# EAGLE board pentajoy_panel_1 (EAGLE 5.11)
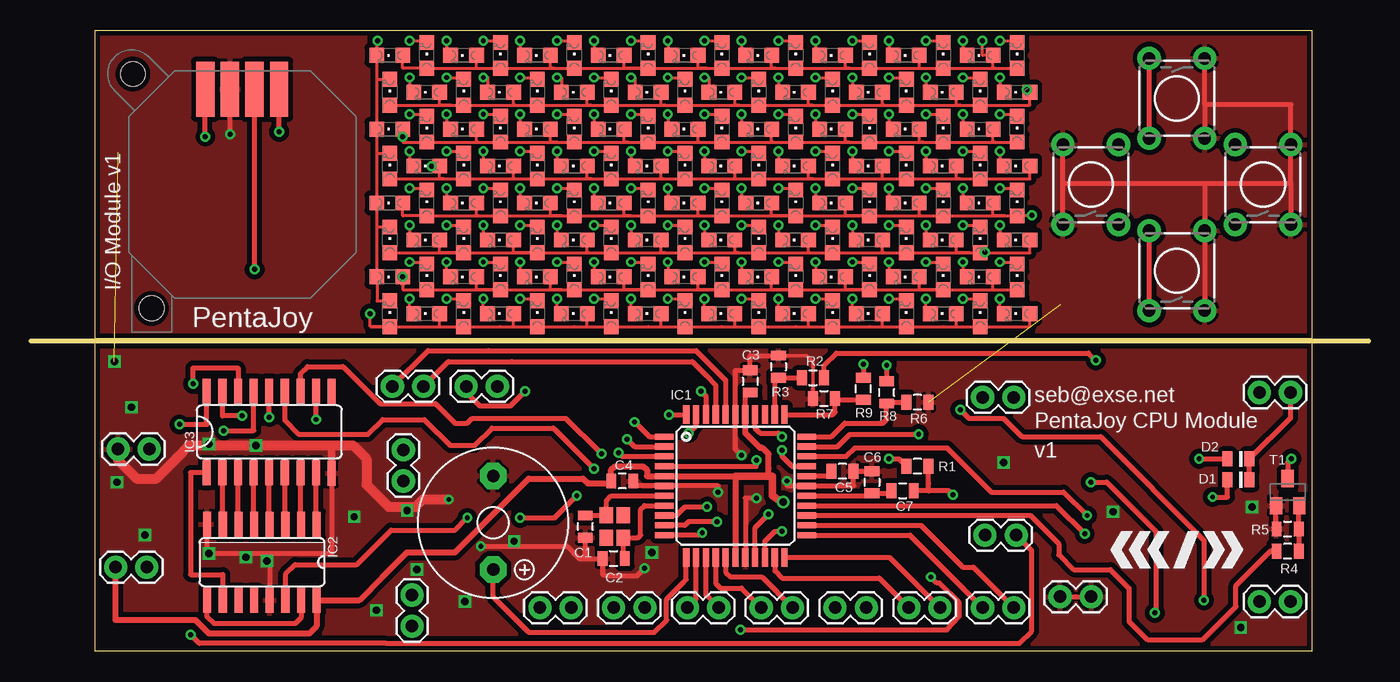
[diagram p0: board, top side]
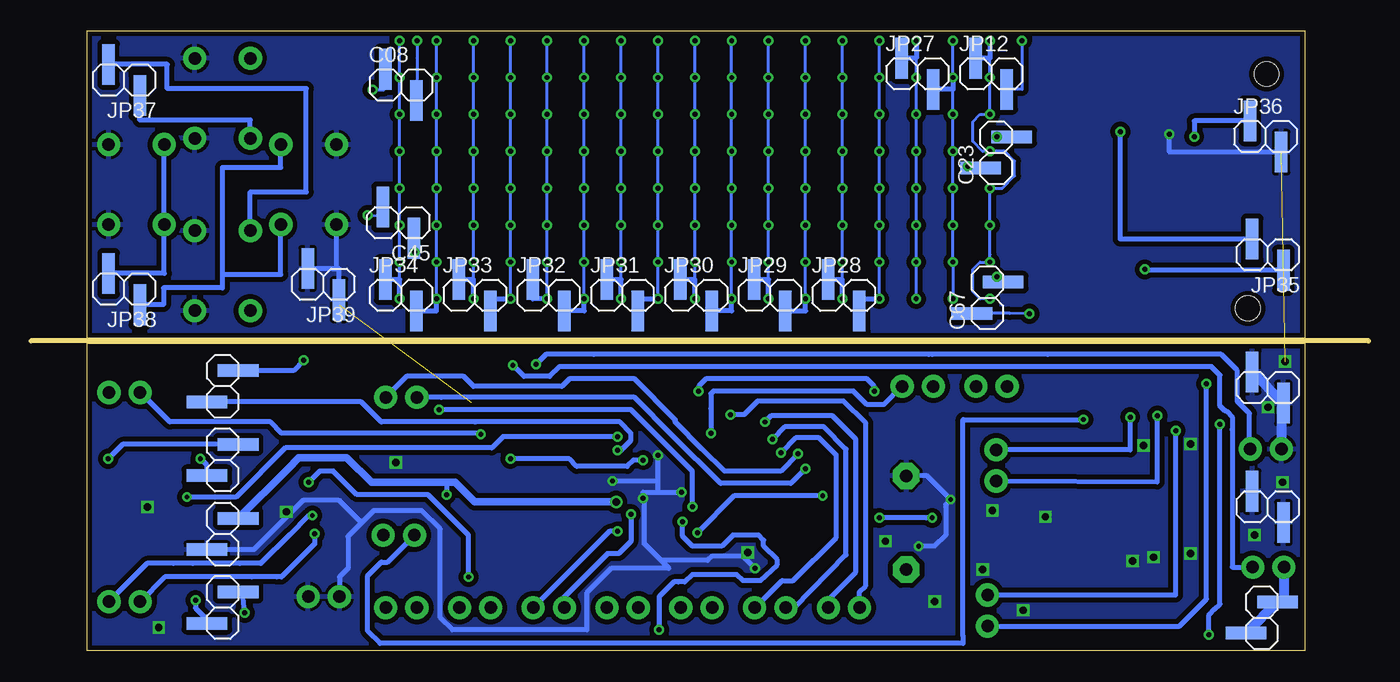
[diagram p1: board, bottom side, seen from below]

Size 108.8 x 50.4 mm. Coordinates in mm from the lower left corner, seen from the top.
Outline: 0,25.2 108.8,25.2
Outline: 104.2,25 5.2,25 5.2,0 104.2,0 104.2,25
Outline: 104.2,50.4 5.2,50.4 5.2,25.4 104.2,25.4 104.2,50.4
Copper layers (1+2*3+16): Top 0.035mm / dielectric 1.5mm / Route2 0.035mm / dielectric 0.15mm / Route3 0.035mm / dielectric 0.2mm / Bottom 0.035mm
Design rules "default *": minimum track width 10mil, minimum drill 0.4mm, track to track 8mil, track to pad 8mil, pad to pad 8mil, via to via 8mil, smd to smd 8mil, copper to edge 15mil, drill to drill 8mil, minimum pad ring 10mil, minimum via ring 8mil, stop-mask expansion 4mil, vias tented up to drill 190mil, thermal gap 10mil

## Footprints (pad centres in the part's own frame; a part is rotated, then mirrored left to right if it is on the bottom)
F/TMB = drill 1.016 pad 2.159 octagon: + 3.81,0; - -3.81,0
0805 = smd 0.8 x 1.2: 1 -0.9,0; 2 0.9,0
1X02SMD = smd 1.016 x 3.302: 1 -1.27,1.27; 2 1.27,-1.27
DIODE_0805 = smd 0.8 x 1.2: 1 -0.9,0; 2 0.9,0
TQFP44 = smd 1.5 x 0.5: 1 -5.8,4; 2 -5.8,3.2; 3 -5.8,2.4; 4 -5.8,1.6; 5 -5.8,0.8; 6 -5.8,0; 7 -5.8,-0.8; 8 -5.8,-1.6; 9 -5.8,-2.4; 10 -5.8,-3.2; 11 -5.8,-4; 23 5.8,-4; 24 5.8,-3.2; 25 5.8,-2.4; 26 5.8,-1.6; 27 5.8,-0.8; 28 5.8,0; 29 5.8,0.8; 30 5.8,1.6; 31 5.8,2.4; 32 5.8,3.2; 33 5.8,4 | smd 0.5 x 1.5: 12 -4,-5.8; 13 -3.2,-5.8; 14 -2.4,-5.8; 15 -1.6,-5.8; 16 -0.8,-5.8; 17 0,-5.8; 18 0.8,-5.8; 19 1.6,-5.8; 20 2.4,-5.8; 21 3.2,-5.8; 22 4,-5.8; 34 4,5.8; 35 3.2,5.8; 36 2.4,5.8; 37 1.6,5.8; 38 0.8,5.8; 39 0,5.8; 40 -0.8,5.8; 41 -1.6,5.8; 42 -2.4,5.8; 43 -3.2,5.8; 44 -4,5.8
SO16 = smd 0.66 x 2.032: 1 -4.445,-3.073; 2 -3.175,-3.073; 3 -1.905,-3.073; 4 -0.635,-3.073; 5 0.635,-3.073; 6 1.905,-3.073; 7 3.175,-3.073; 8 4.445,-3.073; 9 4.445,3.073; 10 3.175,3.073; 11 1.905,3.073; 12 0.635,3.073; 13 -0.635,3.073; 14 -1.905,3.073; 15 -3.175,3.073; 16 -4.445,3.073
SO018 = smd 0.66 x 2.032: 1 -5.08,-3.315; 2 -3.81,-3.315; 3 -2.54,-3.315; 4 -1.27,-3.315; 5 0,-3.315; 6 1.27,-3.315; 7 2.54,-3.315; 8 3.81,-3.315; 9 5.08,-3.353; 10 5.08,3.315; 11 3.81,3.315; 12 2.54,3.315; 13 1.27,3.315; 14 0,3.315; 15 -1.27,3.315; 16 -2.54,3.315; 17 -3.81,3.315; 18 -5.08,3.315
1X02 = drill 1.016 pad 1.88 round: 1 0,0; 2 2.54,0
CHIPLED_0805 = smd 1.2 x 1.2: A 0,-1.05; C 0,1.05
X22 = smd 1.3 x 1.1: 1 0.9,0.7; 2 -0.9,0.7; 3 -0.9,-0.7; 4 0.9,-0.7
TACTILE-PTH = drill 1.016 pad 1.88 round: 1 -3.251,2.261; 2 3.251,2.261; 3 -3.251,-2.261; 4 3.251,-2.261
SOT23-EBC = smd 1 x 1.4: B 0.95,-1.1; C 0,1.1; E -0.95,-1.1
JOYSTICK-PSP1000 = smd 1.5 x 4.5: GND -3,7.75; VCC 1,7.75; X 3,7.75; Y -1,7.75 | hole 2: -8.89,8.985; -7.375,-10.06

## Placement (x,y rotation side)
BUZZ  F/TMB  [F/TMB]  37.6,10.4 270 top
C1  22pF  [0805]  45.1,10.1 90 top
C2  22pF  [0805]  47.4,7.5 0 top
C3  22pF  [0805]  58.5,21.9 270 top
C4  22pF  [0805]  48.1,13.8 180 top
C5  22pF  [0805]  66,14.6 180 top
C6  22pF  [0805]  68.4,13.7 270 top
C7  22pF  [0805]  70.9,13 0 top
C08  [1X02SMD]  78.7,46 0 bottom
C23  [1X02SMD]  30.3,40.5 90 bottom
C45  [1X02SMD]  78.9,34.8 180 bottom
C67  [1X02SMD]  31,28.7 90 bottom
D1  4148  [DIODE_0805]  98.2,13.9 180 top
D2  4148  [DIODE_0805]  98.2,15.6 180 top
IC1  ATMEGA644A  [TQFP44]  57.3,13.4 0 top
IC2  4017D  [SO16]  18.8,7.2 180 top
IC3  [SO018]  19.4,17.8 0 top
JP1  [1X02]  7.1,16.4 0 top
JP2  [1X02]  6.9,6.8 0 top
JP3  [1X02]  99.9,21 0 top
JP4  [1X02]  99.9,4 0 top
JP5  [1X02]  83.7,4.4 0 top
JP6  [1X02SMD]  8.2,21.4 180 bottom
JP7  [1X02SMD]  93.2,9.5 90 bottom
JP8  [1X02SMD]  93.2,3.5 270 bottom
JP9  [1X02SMD]  93.2,21.5 270 bottom
JP10  [1X02SMD]  8.2,11.7 180 bottom
JP11  [1X02SMD]  93.2,15.5 270 bottom
JP12  [1X02SMD]  30.7,46.9 0 bottom
JP13  [1X02SMD]  8.7,2.7 90 bottom
JP14  [1X02]  31,2 90 top
JP15  [1X02]  30.3,13.8 90 top
JP16  [1X02]  29.4,21.5 0 top
JP17  [1X02]  35.4,21.5 0 top
JP18  [1X02]  41.4,3.5 0 top
JP19  [1X02]  47.4,3.5 0 top
JP20  [1X02]  53.4,3.5 0 top
JP21  [1X02]  59.4,3.5 0 top
JP22  [1X02]  65.4,3.5 0 top
JP23  [1X02]  71.4,3.5 0 top
JP24  [1X02]  77.4,3.5 0 top
JP25  [1X02]  77.6,9.4 0 top
JP26  [1X02]  77.4,20.6 0 top
JP27  [1X02SMD]  36.7,46.9 0 bottom
JP28  [1X02SMD]  42.7,28.9 0 bottom
JP29  [1X02SMD]  48.7,28.9 0 bottom
JP30  [1X02SMD]  54.7,28.9 0 bottom
JP31  [1X02SMD]  60.7,28.9 0 bottom
JP32  [1X02SMD]  66.7,28.9 0 bottom
JP33  [1X02SMD]  72.7,28.9 0 bottom
JP34  [1X02SMD]  78.7,28.9 0 bottom
JP35  [1X02SMD]  8.2,32.2 180 bottom
JP36  [1X02SMD]  8.4,41.8 0 bottom
JP37  [1X02SMD]  101.2,46.4 180 bottom
JP38  [1X02SMD]  101.2,29.4 180 bottom
JP39  [1X02SMD]  85,29.8 180 bottom
LED1  [CHIPLED_0805]  29.2,27.4 0 top
LED2  [CHIPLED_0805]  32.2,27.4 90 top
LED3  [CHIPLED_0805]  35.2,27.4 0 top
LED4  [CHIPLED_0805]  38.2,27.4 90 top
LED5  [CHIPLED_0805]  41.2,27.4 0 top
LED6  [CHIPLED_0805]  44.2,27.4 90 top
LED7  [CHIPLED_0805]  47.2,27.4 0 top
LED8  [CHIPLED_0805]  50.2,27.4 90 top
LED9  [CHIPLED_0805]  53.2,27.4 0 top
LED10  [CHIPLED_0805]  56.2,27.4 90 top
LED11  [CHIPLED_0805]  59.2,27.4 0 top
LED12  [CHIPLED_0805]  62.2,27.4 90 top
LED13  [CHIPLED_0805]  65.2,27.4 0 top
LED14  [CHIPLED_0805]  68.2,27.4 90 top
LED15  [CHIPLED_0805]  71.2,27.4 0 top
LED16  [CHIPLED_0805]  74.2,27.4 90 top
LED17  [CHIPLED_0805]  77.2,27.4 0 top
LED18  [CHIPLED_0805]  80.2,27.4 90 top
LED19  [CHIPLED_0805]  29.2,30.4 90 top
LED20  [CHIPLED_0805]  32.2,30.4 0 top
LED21  [CHIPLED_0805]  35.2,30.4 90 top
LED22  [CHIPLED_0805]  38.2,30.4 0 top
LED23  [CHIPLED_0805]  41.2,30.4 90 top
LED24  [CHIPLED_0805]  44.2,30.4 0 top
LED25  [CHIPLED_0805]  47.2,30.4 90 top
LED26  [CHIPLED_0805]  50.2,30.4 0 top
LED27  [CHIPLED_0805]  53.2,30.4 90 top
LED28  [CHIPLED_0805]  56.2,30.4 0 top
LED29  [CHIPLED_0805]  59.2,30.4 90 top
LED30  [CHIPLED_0805]  62.2,30.4 0 top
LED31  [CHIPLED_0805]  65.2,30.4 90 top
LED32  [CHIPLED_0805]  68.2,30.4 0 top
LED33  [CHIPLED_0805]  71.2,30.4 90 top
LED34  [CHIPLED_0805]  74.2,30.4 0 top
LED35  [CHIPLED_0805]  77.2,30.4 90 top
LED36  [CHIPLED_0805]  80.2,30.4 0 top
LED37  [CHIPLED_0805]  29.2,33.4 0 top
LED38  [CHIPLED_0805]  32.2,33.4 90 top
LED39  [CHIPLED_0805]  35.2,33.4 0 top
LED40  [CHIPLED_0805]  38.2,33.4 90 top
LED41  [CHIPLED_0805]  41.2,33.4 0 top
LED42  [CHIPLED_0805]  44.2,33.4 90 top
LED43  [CHIPLED_0805]  47.2,33.4 0 top
LED44  [CHIPLED_0805]  50.2,33.4 90 top
LED45  [CHIPLED_0805]  53.2,33.4 0 top
LED46  [CHIPLED_0805]  56.2,33.4 90 top
LED47  [CHIPLED_0805]  59.2,33.4 0 top
LED48  [CHIPLED_0805]  62.2,33.4 90 top
LED49  [CHIPLED_0805]  65.2,33.4 0 top
LED50  [CHIPLED_0805]  68.2,33.4 90 top
LED51  [CHIPLED_0805]  71.2,33.4 0 top
LED52  [CHIPLED_0805]  74.2,33.4 90 top
LED53  [CHIPLED_0805]  77.2,33.4 0 top
LED54  [CHIPLED_0805]  80.2,33.4 90 top
LED55  [CHIPLED_0805]  29.2,36.4 90 top
LED56  [CHIPLED_0805]  32.2,36.4 0 top
LED57  [CHIPLED_0805]  35.2,36.4 90 top
LED58  [CHIPLED_0805]  38.2,36.4 0 top
LED59  [CHIPLED_0805]  41.2,36.4 90 top
LED60  [CHIPLED_0805]  44.2,36.4 0 top
LED61  [CHIPLED_0805]  47.2,36.4 90 top
LED62  [CHIPLED_0805]  50.2,36.4 0 top
LED63  [CHIPLED_0805]  53.2,36.4 90 top
LED64  [CHIPLED_0805]  56.2,36.4 0 top
LED65  [CHIPLED_0805]  59.2,36.4 90 top
LED66  [CHIPLED_0805]  62.2,36.4 0 top
LED67  [CHIPLED_0805]  65.2,36.4 90 top
LED68  [CHIPLED_0805]  68.2,36.4 0 top
LED69  [CHIPLED_0805]  71.2,36.4 90 top
LED70  [CHIPLED_0805]  74.2,36.4 0 top
LED71  [CHIPLED_0805]  77.2,36.4 90 top
LED72  [CHIPLED_0805]  80.2,36.4 0 top
LED73  [CHIPLED_0805]  29.2,39.4 0 top
LED74  [CHIPLED_0805]  32.2,39.4 90 top
LED75  [CHIPLED_0805]  35.2,39.4 0 top
LED76  [CHIPLED_0805]  38.2,39.4 90 top
LED77  [CHIPLED_0805]  41.2,39.4 0 top
LED78  [CHIPLED_0805]  44.2,39.4 90 top
LED79  [CHIPLED_0805]  47.2,39.4 0 top
LED80  [CHIPLED_0805]  50.2,39.4 90 top
LED81  [CHIPLED_0805]  53.2,39.4 0 top
LED82  [CHIPLED_0805]  56.2,39.4 90 top
LED83  [CHIPLED_0805]  59.2,39.4 0 top
LED84  [CHIPLED_0805]  62.2,39.4 90 top
LED85  [CHIPLED_0805]  65.2,39.4 0 top
LED86  [CHIPLED_0805]  68.2,39.4 90 top
LED87  [CHIPLED_0805]  71.2,39.4 0 top
LED88  [CHIPLED_0805]  74.2,39.4 90 top
LED89  [CHIPLED_0805]  77.2,39.4 0 top
LED90  [CHIPLED_0805]  80.2,39.4 90 top
LED91  [CHIPLED_0805]  29.2,42.4 90 top
LED92  [CHIPLED_0805]  32.2,42.4 0 top
LED93  [CHIPLED_0805]  35.2,42.4 90 top
LED94  [CHIPLED_0805]  38.2,42.4 0 top
LED95  [CHIPLED_0805]  41.2,42.4 90 top
LED96  [CHIPLED_0805]  44.2,42.4 0 top
LED97  [CHIPLED_0805]  47.2,42.4 90 top
LED98  [CHIPLED_0805]  50.2,42.4 0 top
LED99  [CHIPLED_0805]  53.2,42.4 90 top
LED100  [CHIPLED_0805]  56.2,42.4 0 top
LED101  [CHIPLED_0805]  59.2,42.4 90 top
LED102  [CHIPLED_0805]  62.2,42.4 0 top
LED103  [CHIPLED_0805]  65.2,42.4 90 top
LED104  [CHIPLED_0805]  68.2,42.4 0 top
LED105  [CHIPLED_0805]  71.2,42.4 90 top
LED106  [CHIPLED_0805]  74.2,42.4 0 top
LED107  [CHIPLED_0805]  77.2,42.4 90 top
LED108  [CHIPLED_0805]  80.2,42.4 0 top
LED109  [CHIPLED_0805]  29.2,45.4 0 top
LED110  [CHIPLED_0805]  32.2,45.4 90 top
LED111  [CHIPLED_0805]  35.2,45.4 0 top
LED112  [CHIPLED_0805]  38.2,45.4 90 top
LED113  [CHIPLED_0805]  41.2,45.4 0 top
LED114  [CHIPLED_0805]  44.2,45.4 90 top
LED115  [CHIPLED_0805]  47.2,45.4 0 top
LED116  [CHIPLED_0805]  50.2,45.4 90 top
LED117  [CHIPLED_0805]  53.2,45.4 0 top
LED118  [CHIPLED_0805]  56.2,45.4 90 top
LED119  [CHIPLED_0805]  59.2,45.4 0 top
LED120  [CHIPLED_0805]  62.2,45.4 90 top
LED121  [CHIPLED_0805]  65.2,45.4 0 top
LED122  [CHIPLED_0805]  68.2,45.4 90 top
LED123  [CHIPLED_0805]  71.2,45.4 0 top
LED124  [CHIPLED_0805]  74.2,45.4 90 top
LED125  [CHIPLED_0805]  77.2,45.4 0 top
LED126  [CHIPLED_0805]  80.2,45.4 90 top
LED127  [CHIPLED_0805]  29.2,48.4 90 top
LED128  [CHIPLED_0805]  32.2,48.4 0 top
LED129  [CHIPLED_0805]  35.2,48.4 90 top
LED130  [CHIPLED_0805]  38.2,48.4 0 top
LED131  [CHIPLED_0805]  41.2,48.4 90 top
LED132  [CHIPLED_0805]  44.2,48.4 0 top
LED133  [CHIPLED_0805]  47.2,48.4 90 top
LED134  [CHIPLED_0805]  50.2,48.4 0 top
LED135  [CHIPLED_0805]  53.2,48.4 90 top
LED136  [CHIPLED_0805]  56.2,48.4 0 top
LED137  [CHIPLED_0805]  59.2,48.4 90 top
LED138  [CHIPLED_0805]  62.2,48.4 0 top
LED139  [CHIPLED_0805]  65.2,48.4 90 top
LED140  [CHIPLED_0805]  68.2,48.4 0 top
LED141  [CHIPLED_0805]  71.2,48.4 90 top
LED142  [CHIPLED_0805]  74.2,48.4 0 top
LED143  [CHIPLED_0805]  77.2,48.4 90 top
LED144  [CHIPLED_0805]  80.2,48.4 0 top
Q1  20Mhz  [X22]  47.5,10.1 270 top
R1  4,7k  [0805]  72.1,15 180 top
R2  4,7k  [0805]  63.6,22.2 0 top
R3  4,7k  [0805]  60.8,23.1 270 top
R4  4,7k  [0805]  102.2,8.1 180 top
R5  4,7k  [0805]  102.2,9.9 0 top
R6  4,7k  [0805]  72.1,20.2 180 top
R7  4,7k  [0805]  64.5,20.5 0 top
R8  4,7k  [0805]  69.6,21 90 top
R9  4,7k  [0805]  67.7,21.3 90 top
S1  [TACTILE-PTH]  93.2,44.9 270 top
S2  [TACTILE-PTH]  86.2,37.9 90 top
S3  [TACTILE-PTH]  100.2,37.9 90 top
S5  [TACTILE-PTH]  93.2,30.9 90 top
T1  [SOT23-EBC]  102.2,12.9 0 top
U$1  JOYSTICK-PSP1000  [JOYSTICK-PSP1000]  17.2,37.9 0 top

## Library data of the parts
BUZZ = buzzer
C1-C7 IC3 JP1-JP5 JP14-JP26 R1-R9 S1-S3 S5 U$1 = SparkFun
C08 C23 C45 C67 JP6-JP13 JP27-JP39 = pinhead-2
D1 D2 Q1 = seb
IC1 = atmel; MPN: ATMEGA644PV-10AU; OC_FARNELL: 1455123; OC_NEWARK: 58M3748
IC2 = 40xx
LED1-LED144 = led
T1 = transistor

## Nets
+5V: C3.2 C4.2 C7.2 IC1.5 IC1.17 IC1.38 IC2.16 JP2.1 JP7.2 JP13.1 JP13.2 R1.1
B: IC1.26 JP4.1
C: IC1.31 JP4.2
COL0: IC1.40 JP16.1
COL1: IC1.41 JP16.2
COL2: IC1.42 JP17.1
COL3: IC1.43 JP17.2
COL4: IC1.44 JP18.1
COL5: IC1.1 JP18.2
COL6: IC1.2 JP19.1
COL7: IC1.3 JP19.2
COL8: IC1.13 JP20.1
COL9: IC1.14 JP20.2
COL10: IC1.15 JP21.1
COL11: IC1.16 JP21.2
COL12: IC1.19 JP22.1
COL13: IC1.20 JP22.2
COL14: IC1.21 JP23.1
COL15: IC1.22 JP23.2
COL16: IC1.23 JP24.1
COL17: IC1.24 JP24.2
COL18: JP12.2 LED1.C LED19.C LED37.C LED55.C LED73.C LED91.C LED109.C LED127.C
COL19: JP12.1 LED2.C LED20.C LED38.C LED56.C LED74.C LED92.C LED110.C LED128.C
COL20: JP27.2 LED3.C LED21.C LED39.C LED57.C LED75.C LED93.C LED111.C LED129.C
COL21: JP27.1 LED4.C LED22.C LED40.C LED58.C LED76.C LED94.C LED112.C LED130.C
COL22: JP28.2 LED5.C LED23.C LED41.C LED59.C LED77.C LED95.C LED113.C LED131.C
COL23: JP28.1 LED6.C LED24.C LED42.C LED60.C LED78.C LED96.C LED114.C LED132.C
COL24: JP29.2 LED7.C LED25.C LED43.C LED61.C LED79.C LED97.C LED115.C LED133.C
COL25: JP30.1 LED10.C LED28.C LED46.C LED64.C LED82.C LED100.C LED118.C LED136.C
COL26: JP31.2 LED11.C LED29.C LED47.C LED65.C LED83.C LED101.C LED119.C LED137.C
COL27: JP30.2 LED9.C LED27.C LED45.C LED63.C LED81.C LED99.C LED117.C LED135.C
COL28: JP29.1 LED8.C LED26.C LED44.C LED62.C LED80.C LED98.C LED116.C LED134.C
COL29: JP31.1 LED12.C LED30.C LED48.C LED66.C LED84.C LED102.C LED120.C LED138.C
COL30: JP32.2 LED13.C LED31.C LED49.C LED67.C LED85.C LED103.C LED121.C LED139.C
COL31: JP32.1 LED14.C LED32.C LED50.C LED68.C LED86.C LED104.C LED122.C LED140.C
COL32: JP33.2 LED15.C LED33.C LED51.C LED69.C LED87.C LED105.C LED123.C LED141.C
COL33: JP33.1 LED16.C LED34.C LED52.C LED70.C LED88.C LED106.C LED124.C LED142.C
COL34: JP34.2 LED17.C LED35.C LED53.C LED71.C LED89.C LED107.C LED125.C LED143.C
COL35: JP34.1 LED18.C LED36.C LED54.C LED72.C LED90.C LED108.C LED126.C LED144.C
D: IC1.32 JP3.1
E: D1.1 D2.1 JP3.2
GND: BUZZ.- C1.1 C2.1 C3.1 C4.1 C5.1 C6.1 IC1.6 IC1.18 IC1.28 IC1.39 IC2.8 IC2.13 IC3.9 JP1.1 JP5.1 JP5.2 JP6.1 JP6.2 JP7.1 JP10.1 JP10.2 JP36.2 JP39.1 JP39.2 R3.1 R5.1 R6.1 R7.1 S1.1 S1.2 S2.1 S2.2 S3.3 S3.4 S5.3 S5.4 T1.E U$1.Y
N$1: D1.2 IC1.37
N$2: IC1.25 R4.2
N$3: C5.2 IC1.29
N$4: IC1.30 JP9.2
N$5: IC1.11 IC2.14
N$6: IC2.9 IC2.15
N$7: C2.2 IC1.8 Q1.1
N$8: C1.2 IC1.7 Q1.3
N$9: C6.2 C7.1 IC1.27
N$10: R4.1 R5.2 T1.B
N$11: BUZZ.+ IC1.12
N$12: JP38.1 S2.3 S2.4
N$13: JP38.2 S3.1 S3.2
N$14: IC1.33 R6.2 R8.1
N$15: IC1.34 R7.2 R9.1
N$16: JP37.1 S1.3 S1.4
N$17: JP37.2 S5.1 S5.2
N$20: JP35.1 U$1.VCC
N$21: JP35.2 U$1.X
N$22: JP36.1 U$1.GND
N$28: IC1.35 R2.1 R3.2
N$56: IC2.1 IC3.8
N$57: IC2.2 IC3.7
N$58: IC2.3 IC3.6
N$59: IC2.4 IC3.5
N$60: IC2.5 IC3.4
N$61: IC2.6 IC3.3
N$62: IC2.7 IC3.2
N$63: IC2.10 IC3.1
OFF: JP11.1 T1.C
ON: D2.2 JP11.2
POWER: JP9.1 R2.2
ROW0: IC3.13 JP26.1
ROW1: IC3.12 JP26.2
ROW2: IC3.14 JP15.2
ROW3: IC3.17 JP15.1
ROW4: IC3.18 JP25.2
ROW5: IC3.11 JP25.1
ROW6: IC3.15 JP14.2
ROW7: IC3.16 JP14.1
ROW8: C67.1 LED1.A LED2.A LED3.A LED4.A LED5.A LED6.A LED7.A LED8.A LED9.A LED10.A LED11.A LED12.A LED13.A LED14.A LED15.A LED16.A LED17.A LED18.A
ROW9: C67.2 LED19.A LED20.A LED21.A LED22.A LED23.A LED24.A LED25.A LED26.A LED27.A LED28.A LED29.A LED30.A LED31.A LED32.A LED33.A LED34.A LED35.A LED36.A
ROW10: C45.1 LED37.A LED38.A LED39.A LED40.A LED41.A LED42.A LED43.A LED44.A LED45.A LED46.A LED47.A LED48.A LED49.A LED50.A LED51.A LED52.A LED53.A LED54.A
ROW11: C45.2 LED55.A LED56.A LED57.A LED58.A LED59.A LED60.A LED61.A LED62.A LED63.A LED64.A LED65.A LED66.A LED67.A LED68.A LED69.A LED70.A LED71.A LED72.A
ROW12: C23.1 LED73.A LED74.A LED75.A LED76.A LED77.A LED78.A LED79.A LED80.A LED81.A LED82.A LED83.A LED84.A LED85.A LED86.A LED87.A LED88.A LED89.A LED90.A
ROW13: C23.2 LED91.A LED92.A LED93.A LED94.A LED95.A LED96.A LED97.A LED98.A LED99.A LED100.A LED101.A LED102.A LED103.A LED104.A LED105.A LED106.A LED107.A LED108.A
ROW14: C08.1 LED109.A LED110.A LED111.A LED112.A LED113.A LED114.A LED115.A LED116.A LED117.A LED118.A LED119.A LED120.A LED121.A LED122.A LED123.A LED124.A LED125.A LED126.A
ROW15: C08.2 LED127.A LED128.A LED129.A LED130.A LED131.A LED132.A LED133.A LED134.A LED135.A LED136.A LED137.A LED138.A LED139.A LED140.A LED141.A LED142.A LED143.A LED144.A
RST: IC1.4 R1.2
RX: IC1.9 JP8.2
TX: IC1.10 JP8.1
X: JP1.2 R9.2
Y: JP2.2 R8.2

## Tracks (layer width: path | path; a pad name or v marks a point on that pad's centre or on a via)
+5V  (via drill 0.4, 0.6)
  Top 0.406: 60,14.2 60.3,14.2 | 73,13 C7.2 | 73,13 73,13.6 R1.1 | 61,12.1 v61.2,12.1 | 47.2,13.6 C4.2 | v75,12.7 74.7,13 73,13 | IC1.38 58.1,21 C3.2
  Top 0.5: IC1.17 57.3,14.2 IC1.5 50.1,14.2 50.1,14.7 49.8,15 47.5,15 47.2,14.7 C4.2 | IC1.38 58.1,17.9 58.1,17.7 58.8,17 59.3,16.5 59.5,16.5 60,16 60,14.8 60,14.2 | JP2.1 6.9,2.5 13.4,2.5 14.5,1.4 22.64,1.4 23.24,2 IC2.16 26.73,4.13 28.6,6 30.6,8 34.5,8 40.5,14 44.9,14 45,13.9 45.3,13.6 47.2,13.6
  Top 0.61: 57.3,14.2 60,14.2 | 60,14.2 60.3,14.2 | 60,14.2 60.3,14.2 | 60.3,14.2 60.3,12.6 61,12.1
  Bottom 0.406: 6.9,4.3 JP13.2 | 74.3,13.7 75,13.7 v75,12.7
  Bottom 0.61: v61.2,12.1 72.7,12.1 74.3,13.7 75,13.7 81.1,13.7 83.1,15.7 87,15.7 87.93,14.77 JP7.2
  Bottom 0.813: JP13.2 JP13.1 | JP2.1 6.9,4.3
B  (via drill 0.4)
  Top 0.406: IC1.26 83.4,11.8 v85.7,9.5
  Bottom 0.406: v85.7,9.5 85.7,8.7 88.4,6 88.8,6 90.8,6 97.9,6 JP4.1
C  (via drill 0.4)
  Top 0.406: IC1.31 66.3,15.8 67,16.5 74.5,16.5 78.1,12.9 84,12.9 v85.9,11
  Bottom 0.406: v85.9,11 86.2,11 87.8,9.4 | 87.8,9.4 88,9.2 87.8,9.4 | 87.8,9.4 90.1,7.1 91.8,7.1 95.6,7.1 97.2,7.1 99.34,7.1 JP4.2
COL0
  Top 0.406: JP16.1 32.3,24.4 37.2,24.4 54.1,24.4 55.9,22.6 56.5,22 IC1.40
COL1
  Top 0.406: JP16.2 33.94,23.5 39.1,23.5 53.8,23.5 54.9,22.4 55.7,21.6 IC1.41
COL2  (via drill 0.4)
  Top 0.406: v40.2,21.1 39,19.9 36.5,19.9 35.4,21 JP17.1 | v54.5,21.1 54.9,20.7 IC1.42
  Bottom 0.406: v54.5,21.1 54.5,21.5 53.9,22.1 40.8,22.1 40.2,21.5 v40.2,21.1
COL3  (via drill 0.4)
  Top 0.406: v53.5,17.7 54.1,18.3 IC1.43
  Bottom 0.406: v53.5,17.7 53.5,19.7 53.5,20.9 53.3,21.1 52.8,21.1 51,21.1 50.6,21.1 41.9,21.1 40.8,20 39.44,20 JP17.2
COL4  (via drill 0.4)
  Top 0.406: v51.9,19.2 IC1.44
  Bottom 0.406: v51.9,19.2 50.8,19.2 49.7,20.3 42.7,20.3 40.9,18.5 40.9,17.9 40.9,5.3 41.4,4.8 JP18.1
COL5  (via drill 0.4)
  Top 0.406: v49.1,18.6 50.3,17.4 IC1.1
  Bottom 0.406: JP18.2 43.94,4.16 41.7,6.4 41.7,17.2 43.6,19.1 48.6,19.1 v49.1,18.6
COL6  (via drill 0.4)
  Top 0.406: v48.5,17.2 49.1,16.6 IC1.2
  Bottom 0.406: JP19.1 46.7,3.5 42.5,7.8 42.5,16.4 44.3,18.2 47.5,18.2 v48.5,17.2
COL7  (via drill 0.4)
  Top 0.406: IC1.3 48.1,15.8 v47.8,16.1
  Bottom 0.406: JP19.2 49.9,3.5 47.7,5.7 46.8,5.7 43.3,9.2 43.3,15.9 44.7,17.3 46.6,17.3 v47.8,16.1
COL8
  Top 0.406: IC1.13 54.1,4.2 JP20.1
COL9
  Top 0.406: JP20.2 54.9,4.54 IC1.14
COL10
  Top 0.406: JP21.1 57.8,5.1 56.1,5.1 55.7,5.5 IC1.15
COL11
  Top 0.406: JP21.2 59.44,6 56.9,6 56.5,6.4 IC1.16
COL12  (via drill 0.4)
  Top 0.406: IC1.19 58.9,10 v60,11.1
  Bottom 0.406: v60,11.1 60,8.9 61,7.9 61.9,7.9 65.4,4.4 JP22.1
COL13  (via drill 0.4)
  Top 0.406: IC1.20 59.7,8.9 60.5,9.7 v61.1,9.7
  Bottom 0.406: v61.1,9.7 61.74,9.7 JP22.2
COL14
  Top 0.406: IC1.21 60.5,6.5 61.1,5.9 69,5.9 JP23.1
COL15
  Top 0.406: IC1.22 69.84,7.6 JP23.2
COL16
  Top 0.406: IC1.23 71.5,9.4 JP24.1
COL17
  Top 0.406: IC1.24 72.4,10.2 75.8,6.8 76.64,6.8 JP24.2
COL18  (via drill 0.4)
  Top 0.254: LED1.C 28.15,28.45 LED19.C 28.15,34.45 | 28.15,34.45 LED37.C | 28.15,34.45 LED55.C 28.15,40.4 | 28.15,40.4 LED91.C 28.15,46.4 | 28.15,46.4 LED127.C 28.15,49.6 v28.2,49.6 | LED73.C 28.15,40.45 28.15,40.4 | LED109.C 28.15,46.45 28.15,46.4
  Bottom 0.254: JP12.2 28.2,45.63 v28.2,49.6
COL19  (via drill 0.4)
  Top 0.254: LED2.C 30.8,27.4 v30.8,28.6 | v30.8,34.6 30.8,33.4 LED38.C | LED20.C 32.2,31.6 v30.8,31.6 | v30.8,49.6 32.2,49.6 LED128.C | LED56.C 32.2,37.6 v30.8,37.6 | LED74.C 30.8,39.4 v30.8,40.6 | LED92.C 32.2,43.6 v30.8,43.6 | LED110.C 30.8,45.4 v30.8,46.6
  Bottom 0.254: v30.8,31.6 30.8,32.2 | 30.8,32.2 v30.8,34.6 v30.8,37.6 29.8,37.6 28.8,38.6 28.8,39.8 29.6,40.6 v30.8,40.6 31.4,40.6 32.2,41.4 32.2,43 31.6,43.6 v30.8,43.6 v30.8,46.6 | v30.8,31.6 30.8,32.2 | v30.8,46.6 30.8,46.8 | 30.8,46.8 v30.8,49.6 | v30.8,46.6 30.8,46.8 | v30.8,28.6 31.6,28.6 32.2,29.2 32.2,31 31.6,31.6 v30.8,31.6
  Bottom 0.406: JP12.1 30.8,48.17 v30.8,49.6
COL20  (via drill 0.4)
  Top 0.254: LED3.C 35.2,28.6 v33.8,28.6 | v33.8,49.6 33.8,48.4 LED129.C | v33.8,46.6 35.2,46.6 LED111.C | LED93.C 33.8,42.4 v33.8,43.6 | LED57.C 33.8,36.4 v33.8,37.6 | v33.8,40.6 35.2,40.6 LED75.C | v33.8,34.6 35.2,34.6 LED39.C | LED21.C 33.8,30.4 v33.8,31.6
  Bottom 0.254: v33.8,49.6 v33.8,46.6 v33.8,43.6 v33.8,40.6 v33.8,37.6 v33.8,34.6 v33.8,31.6 v33.8,28.6
  Bottom 0.406: JP27.2 33.8,45.63 v33.8,46.6
COL21  (via drill 0.4)
  Top 0.254: LED4.C 36.8,27.4 v36.8,28.6 | v36.8,49.6 38.2,49.6 LED130.C | v36.8,46.6 37.15,46.6 LED112.C | v36.8,43.6 38.2,43.6 LED94.C | v36.8,31.6 38.2,31.6 LED22.C | v36.8,37.6 38.2,37.6 LED58.C | LED40.C 36.8,33.4 v36.8,34.6 | LED76.C 36.8,39.4 v36.8,40.6
  Bottom 0.254: v36.8,49.6 v36.8,46.6 v36.8,43.6 v36.8,40.6 v36.8,37.6 v36.8,34.6 v36.8,31.6 v36.8,28.6
  Bottom 0.406: JP27.1 36.8,48.17 v36.8,49.6
COL22  (via drill 0.4)
  Top 0.254: LED5.C 41.2,28.6 v39.8,28.6 | v39.8,49.6 39.8,48.4 LED131.C | v39.8,46.6 41.2,46.6 LED113.C | v39.8,40.6 41.2,40.6 LED77.C | v39.8,34.6 41.2,34.6 LED41.C | LED95.C 39.8,42.4 v39.8,43.6 | LED23.C 39.8,30.4 v39.8,31.6 | LED59.C 39.8,36.4 v39.8,37.6
  Bottom 0.254: v39.8,49.6 v39.8,46.6 v39.8,43.6 v39.8,40.6 v39.8,37.6 v39.8,34.6 v39.8,31.6 v39.8,28.6
  Bottom 0.406: v39.8,28.6 41.43,28.6 JP28.2
COL23  (via drill 0.4)
  Top 0.254: LED6.C 42.8,27.4 v42.8,28.6 | v42.8,49.6 44.2,49.6 LED132.C | v42.8,46.6 43.15,46.6 LED114.C | v42.8,43.6 44.2,43.6 LED96.C | v42.8,37.6 44.2,37.6 LED60.C | v42.8,31.6 44.2,31.6 LED24.C | LED78.C 42.8,39.4 v42.8,40.6 | LED42.C 42.8,33.4 v42.8,34.6
  Bottom 0.254: v42.8,49.6 v42.8,46.6 v42.8,43.6 v42.8,40.6 v42.8,37.6 v42.8,34.6 v42.8,31.6 v42.8,28.6
  Bottom 0.406: JP28.1 42.8,30.17 v42.8,28.6
COL24  (via drill 0.4)
  Top 0.254: LED7.C 47.2,28.6 v45.8,28.6 | v45.8,49.6 45.8,48.4 LED133.C | v45.8,46.6 47.2,46.6 LED115.C | LED97.C 45.8,42.4 v45.8,43.6 | v45.8,40.6 47.2,40.6 LED79.C | LED25.C 45.8,30.4 v45.8,31.6 | v45.8,34.6 47.2,34.6 LED43.C | LED61.C 45.8,36.4 v45.8,37.6
  Bottom 0.254: v45.8,49.6 v45.8,46.6 v45.8,43.6 v45.8,40.6 v45.8,37.6 v45.8,34.6 v45.8,31.6 v45.8,28.6
  Bottom 0.406: JP29.2 45.8,27.63 v45.8,28.6
COL25  (via drill 0.4)
  Top 0.254: LED10.C 54.8,27.4 v54.8,28.6 | v54.8,49.6 56.2,49.6 LED136.C | v54.8,46.6 55.15,46.6 LED118.C | v54.8,43.6 56.2,43.6 LED100.C | LED46.C 54.8,33.4 v54.8,34.6 | v54.8,37.6 56.2,37.6 LED64.C | LED82.C 54.8,39.4 v54.8,40.6 | v54.8,31.6 56.2,31.6 LED28.C
  Bottom 0.254: v54.8,49.6 v54.8,46.6 v54.8,43.6 v54.8,40.6 v54.8,37.6 v54.8,34.6 v54.8,31.6 v54.8,28.6
  Bottom 0.406: JP30.1 54.8,30.17 v54.8,28.6
COL26  (via drill 0.4)
  Top 0.254: LED11.C 59.2,28.6 v57.8,28.6 | v57.8,49.6 57.8,48.4 LED137.C | v57.8,46.6 59.2,46.6 LED119.C | v57.8,40.6 59.2,40.6 LED83.C | LED29.C 57.8,30.4 v57.8,31.6 | v57.8,34.6 59.2,34.6 LED47.C | LED65.C 57.8,36.4 v57.8,37.6 | LED101.C 57.8,42.4 v57.8,43.6
  Bottom 0.254: v57.8,49.6 v57.8,46.6 v57.8,43.6 v57.8,40.6 v57.8,37.6 v57.8,34.6 v57.8,31.6 v57.8,28.6
  Bottom 0.406: v57.8,28.6 59.43,28.6 JP31.2
COL27  (via drill 0.4)
  Top 0.254: LED9.C 53.2,28.6 v51.8,28.6 | v51.8,49.6 51.8,48.4 LED135.C | v51.8,46.6 53.2,46.6 LED117.C | LED27.C 51.8,30.4 v51.8,31.6 | v51.8,34.6 53.2,34.6 LED45.C | LED63.C 51.8,36.4 v51.8,37.6 | v51.8,40.6 53.2,40.6 LED81.C | LED99.C 51.8,42.4 v51.8,43.6
  Bottom 0.254: v51.8,49.6 v51.8,46.6 v51.8,43.6 v51.8,40.6 v51.8,37.6 v51.8,34.6 v51.8,31.6 v51.8,28.6
  Bottom 0.406: JP30.2 51.8,27.63 v51.8,28.6
COL28  (via drill 0.4)
  Top 0.254: LED8.C 48.8,27.4 v48.8,28.6 | v48.8,49.6 50.2,49.6 LED134.C | v48.8,46.6 49.15,46.6 LED116.C | v48.8,43.6 50.2,43.6 LED98.C | v48.8,37.6 50.2,37.6 LED62.C | v48.8,31.6 50.2,31.6 LED26.C | LED44.C 48.8,33.4 v48.8,34.6 | LED80.C 48.8,39.4 v48.8,40.6
  Bottom 0.254: v48.8,49.6 v48.8,46.6 v48.8,43.6 v48.8,40.6 v48.8,37.6 v48.8,34.6 v48.8,31.6 v48.8,28.6
  Bottom 0.406: JP29.1 48.8,30.17 v48.8,28.6
COL29  (via drill 0.4)
  Top 0.254: LED12.C 60.8,27.4 v60.8,28.6 | v60.8,49.6 62.2,49.6 LED138.C | v60.8,31.6 62.2,31.6 LED30.C | v60.8,43.6 62.2,43.6 LED102.C | 62.2,37.9 LED66.C 62.2,37.6 v60.8,37.6 | LED48.C 60.8,33.4 v60.8,34.6 | LED84.C 60.8,39.4 v60.8,40.6 | LED120.C 60.8,45.4 v60.8,46.6
  Bottom 0.254: v60.8,28.6 v60.8,31.6 v60.8,34.6 v60.8,37.6 v60.8,40.6 v60.8,43.6 v60.8,46.6 v60.8,49.6
  Bottom 0.406: JP31.1 60.8,30.17 v60.8,28.6
COL30  (via drill 0.4)
  Top 0.254: LED13.C 65.2,28.6 v63.8,28.6 | v63.8,49.6 63.8,48.4 LED139.C | v63.8,34.6 65.2,34.6 LED49.C | v63.8,40.6 65.2,40.6 LED85.C | LED31.C 63.8,30.4 v63.8,31.6 | LED67.C 63.8,36.4 v63.8,37.6 | LED103.C 63.8,42.4 v63.8,43.6 | v63.8,46.6 65.2,46.6 LED121.C
  Bottom 0.254: v63.8,28.6 v63.8,31.6 v63.8,34.6 v63.8,37.6 v63.8,40.6 v63.8,43.6 v63.8,46.6 v63.8,49.6
  Bottom 0.406: JP32.2 63.8,27.63 v63.8,28.6
COL31  (via drill 0.4)
  Top 0.254: LED14.C 66.8,27.4 v66.8,28.6 | v66.8,49.6 68.2,49.6 LED140.C | v66.8,43.6 68.2,43.6 LED104.C | v66.8,31.6 68.2,31.6 LED32.C | v66.8,37.6 68.2,37.6 LED68.C | LED50.C 66.8,33.4 v66.8,34.6 | LED86.C 66.8,39.4 v66.8,40.6 | LED122.C 66.8,45.4 v66.8,46.6
  Bottom 0.254: v66.8,28.6 v66.8,31.6 v66.8,34.6 v66.8,37.6 v66.8,40.6 v66.8,43.6 v66.8,46.6 v66.8,49.6
  Bottom 0.406: v66.8,28.6 67.97,28.6 JP32.1
COL32  (via drill 0.4)
  Top 0.254: LED15.C 71.2,28.6 v69.8,28.6 | v69.8,49.6 69.8,48.4 LED141.C | v69.8,34.6 71.2,34.6 LED51.C | v69.8,40.6 71.2,40.6 LED87.C | LED33.C 69.8,30.4 v69.8,31.6 | LED69.C 69.8,36.4 v69.8,37.6 | LED105.C 69.8,42.4 v69.8,43.6 | v69.8,46.6 71.2,46.6 LED123.C
  Bottom 0.254: v69.8,28.6 v69.8,31.6 v69.8,34.6 v69.8,37.6 v69.8,40.6 v69.8,43.6 v69.8,46.6 v69.8,49.6
  Bottom 0.406: v69.8,28.6 71.43,28.6 JP33.2
COL33  (via drill 0.4)
  Top 0.254: LED16.C 72.8,27.4 v72.8,28.6 | v72.8,49.6 74.2,49.6 LED142.C | v72.8,43.6 74.2,43.6 LED106.C | v72.8,31.6 74.2,31.6 LED34.C | v72.8,37.6 74.2,37.6 LED70.C | LED52.C 72.8,33.4 v72.8,34.6 | LED88.C 72.8,39.4 v72.8,40.6 | LED124.C 72.8,45.4 v72.8,46.6
  Bottom 0.254: v72.8,28.6 v72.8,31.6 v72.8,34.6 v72.8,37.6 v72.8,40.6 v72.8,43.6 v72.8,46.6 v72.8,49.6
  Bottom 0.406: JP33.1 72.8,30.17 v72.8,28.6
COL34  (via drill 0.4)
  Top 0.254: LED17.C 77.2,28.6 v75.8,28.6 | v75.8,49.6 75.8,48.4 LED143.C | v75.8,34.6 77.2,34.6 LED53.C | v75.8,40.6 77.2,40.6 LED89.C | LED35.C 75.8,30.4 v75.8,31.6 | LED71.C 75.8,36.4 v75.8,37.6 | LED107.C 75.8,42.4 v75.8,43.6 | v75.8,46.6 77.2,46.6 LED125.C
  Bottom 0.254: v75.8,28.6 v75.8,31.6 v75.8,34.6 v75.8,37.6 v75.8,40.6 v75.8,43.6 v75.8,46.6 v75.8,49.6
  Bottom 0.406: JP34.2 75.8,27.63 v75.8,28.6
COL35  (via drill 0.4)
  Top 0.254: LED18.C 78.8,27.4 v78.8,28.6 | v78.8,49.6 80.2,49.6 LED144.C | v78.8,43.6 80.2,43.6 LED108.C | v78.8,31.6 80.2,31.6 LED36.C | v78.8,37.6 80.2,37.6 LED72.C | LED54.C 78.8,33.4 v78.8,34.6 | LED90.C 78.8,39.4 v78.8,40.6 | LED126.C 78.8,45.4 v78.8,46.6
  Bottom 0.254: v78.8,28.6 v78.8,31.6 v78.8,34.6 v78.8,37.6 v78.8,40.6 v78.8,43.6 v78.8,46.6 v78.8,49.6
  Bottom 0.406: JP34.1 78.8,30.17 v78.8,28.6
D  (via drill 0.4)
  Top 0.406: IC1.32 65.6,16.6 66.6,17.6 67.6,17.6 69.3,17.6 70.1,17.6 v72.2,17.6
  Bottom 0.406: 99.9,21.4 JP3.1 97.5,18.6 89.3,18.6 88.4,17.7 85.3,17.7 85.1,17.7 72.4,17.7 v72.2,17.6
E
  Top 0.406: D1.1 D2.1 102.44,18.94 JP3.2
GND  (via drill 0.4, 0.6)  (2 unrouted)
  Top 0.305: R7.1 63.6,23.5 63.1,24 R3.1
  Top 0.406: v57.8,15.9 57.3,16.4 IC1.39 57.3,22.8 C3.1 58.5,24 R3.1 | v55.9,12.9 55.9,13.4 IC1.6 49,13.4 C4.1 | IC1.18 58.1,12.4 v59,12.4 | 45.1,7.5 C1.1 45.1,7.5 | 45.1,7.5 44.6,7.5 43.6,8.5 v36.6,8.5 | v61.5,13.8 61.5,13.4 IC1.28 66.9,13.4 C5.1 C6.1 | IC2.8 14.35,7.9 19,7.9 19.43,7.9 | 19.43,7.9 IC2.13 | IC3.9 24.48,7.9 19.43,7.9 | v49.9,6.7 49.3,6.1 47,6.1 46.5,6.2 C2.1 45.1,7.5 | JP5.1 JP5.2 | R5.1 101.25,9.85 T1.E | 95.46,44.4 S1.2 | 95.46,44.4 S1.1 | 95.46,44.4 102.46,44.4 S3.4 102.46,38 | 102.46,38 S3.3 | 95.46,38 S5.4 S5.3 | 95.46,38 102.46,38 | S2.1 83.94,37.5 | 83.94,37.5 83.94,38 95.46,38 | 83.94,37.5 S2.2 | v16.2,42 U$1.Y
  Top 0.61: IC3.9 24.48,16.7 23.9,16.7
  Top 0.813: JP1.1 7.1,15.5 8.6,14 10.2,14 11.9,15.7 12.9,16.7 17.6,16.7 23.9,16.7 24.9,16.7 26.2,16.7 27.3,15.6 27.3,13.5 28.4,12.4 29.1,11.7 29.9,11.7 31.3,11.7 31.9,12.3 v34,12.3
  Bottom 0.406: 57.8,12.9 57.8,13.4 | 57.8,13.4 57.8,13.8 | 57.8,13.8 v57.8,15.9 | 57.8,12.9 v55.9,12.9 | 57.8,12.9 59,12.9 v59,12.4 58.9,12.3 58.9,8.7 57.55,7.35 | 57.8,13.8 v61.5,13.8 | 57.8,13.4 57.8,13.8 | v36.6,8.5 35.3,8.5 34.4,9.4 34.4,11.7 34.4,11.9 v34,12.3 35.91,14.21 BUZZ.- | 57.55,7.35 56.9,6.7 61.6,6.7 63.6,4.7 63.6,4.5 63.6,4.3 63.6,1.7 74.5,1.7 75.5,2.7 75.5,9.9 77,11.4 80.9,11.4 81.9,10.4 | JP5.1 83.7,6 83,6.7 83,9.3 81.9,10.4 | v49.9,6.7 50.9,7.7 53.4,7.7 53.75,7.35 57.55,7.35 | 81.9,10.4 83.73,12.23 86.67,12.23 90.2,8.7 90.67,8.23 JP7.1 | 83.73,28.14 JP39.1 83.73,31.07 84.3,31.07 | S2.1 83.94,31.07 84.3,31.07 | 84.3,31.07 JP39.2 | JP36.2 16.2,40.53 v16.2,42
  Bottom 0.813: JP1.1 7.1,19.76 JP6.1 JP6.2
  other vias: 88,11.3 79.1,15.3 50.5,8 35.3,4 39.3,8.9 31.4,6.6 30.6,11.4 26.3,10.9 28.1,3.3 19.2,7.3 17.5,7.6 14.5,7.9 18.3,16.7 14.5,16.8 9.3,9.4 7,13.7 8.2,19.8 6.8,23.5 98.4,1.9 99.3,11.7
  pour Bottom (isolate 0.4): 5.2,25.2 104.2,25.2 104.2,0 5.2,0
  pour Top (isolate 0.4): 5.2,25.2 104.2,25.2 104.2,0 5.2,0
  pour Bottom (isolate 0.4): 104.2,25.4 5.2,25.4 5.2,50.4 104.2,50.4
  pour Top (isolate 0.4): 104.2,25.4 5.2,25.4 5.2,50.4 104.2,50.4
N$1  (via drill 0.4)
  Top 0.406: IC1.37 58.9,18.1 59.3,17.7 60.8,17.7 v61.1,17.4 | v96.1,12.5 97.3,12.5 D1.2
  Bottom 0.406: v61.1,17.4 70.4,17.4 71.3,16.5 88.1,16.5 92.1,12.5 95,12.5 v96.1,12.5
N$2
  Top 0.406: IC1.25 81.3,11 83.6,8.7 83.6,7.8 84.8,6.6 87.8,6.6 89.3,5.1 89.3,2.4 90.8,0.9 95.3,0.9 98,3.6 98,5.3 98.9,6.2 100.8,8.1 R4.2
N$3
  Top 0.406: IC1.29 65.1,14.2 C5.2
N$4  (via drill 0.4)
  Top 0.406: IC1.30 61.9,15 61.1,15.8 v61.1,16.3
  Bottom 0.406: v61.1,16.3 60.8,16.3 60.2,16.9 60,17.1 60,17.7 60.9,18.6 72.6,18.6 72.7,18.6 80.3,18.6 80.6,18.9 81.93,20.23 JP9.2
N$5  (via drill 0.4)
  Top 0.406: 44.11,12.3 v44.4,12.6 42.6,10.8 v39.8,10.8 | v54.6,9.6 54.3,9.4 IC1.11 | IC2.14 20.7,6.21 21.5,7 26.5,7 29.3,9.8 34.5,9.8 v35.5,10.8
  Bottom 0.406: v44.4,12.6 51.6,12.6 v54.6,9.6 | v35.5,10.8 36,10.8 v39.8,10.8
N$6
  Top 0.406: IC2.9 14.35,2.75 14.9,2.2 21.5,2.2 21.8,2.5 21.98,2.67 IC2.15
N$7
  Top 0.406: IC1.8 49.9,11.8 49.6,11.5 49.6,9.4 49.5,9.3 49.4,9.2 Q1.1 48.2,7.6 C2.2
N$8
  Top 0.406: IC1.7 47.2,12.6 46.8,12.2 Q1.3 C1.2
N$9
  Top 0.406: IC1.27 68.4,12.6 C6.2 70,12.8 C7.1
N$10
  Top 0.406: R4.1 R5.2 103.1,11.15 T1.B
N$11
  Top 0.406: BUZZ.+ 37.6,4.4 40.5,1.5 50.7,1.5 51.7,2.5 51.7,4.2 53.1,5.6 53.3,5.8 IC1.12
N$12
  Bottom 0.406: JP38.1 98,28.13 98,29.5 93.2,29.5 93.2,30.6 | S2.4 88.46,39.3 93.2,39.3 93.2,30.6 | 93.2,30.6 89.1,30.6 88.46,30.6 S2.3
N$13
  Bottom 0.406: JP38.2 97.94,30.67 S3.1 S3.2
N$14
  Top 0.406: IC1.33 65.1,17.4 66.2,18.5 69.3,18.5 69.5,18.7 69.6,18.8 R8.1 69.7,20.2 R6.2
N$15
  Top 0.406: IC1.34 65.2,19.2 65.3,19.3 65.4,19.4 R7.2 65.5,20.4 R9.1
N$16
  Top 0.406: S1.4 S1.3
  Bottom 0.406: JP37.1 99.93,43.14 90.94,43.14 S1.4
N$17
  Top 0.406: S5.1 S5.2
  Bottom 0.406: JP37.2 97.7,47.67 97.7,45.7 86.4,45.7 86.4,37.3 90.94,37.3 S5.2
N$20  (via drill 0.4)
  Top 0.406: v18.2,31 U$1.VCC
  Bottom 0.406: JP35.1 18.2,30.93 v18.2,31
N$21  (via drill 0.4)
  Top 0.406: v20.2,42.2 U$1.X
  Bottom 0.406: JP35.2 20.2,33.47 v20.2,42.2
N$22  (via drill 0.4)
  Top 0.406: v14.2,41.8 U$1.GND
  Bottom 0.406: JP36.1 14.2,43.07 v14.2,41.8
N$28
  Top 0.406: IC1.35 60.5,21.9 R3.2 R2.1
N$56
  Top 0.406: IC2.1 23.21,10.27 IC3.8
N$57
  Top 0.406: IC2.2 21.94,10.27 IC3.7
N$58
  Top 0.406: IC2.3 20.7,10.8 20.67,10.8 IC3.6
N$59
  Top 0.406: IC2.4 19.4,10.27 IC3.5
N$60
  Top 0.406: IC2.5 18.13,10.27 IC3.4
N$61
  Top 0.406: IC2.6 16.86,10.27 IC3.3
N$62
  Top 0.406: IC2.7 15.59,10.27 IC3.2
N$63
  Top 0.406: IC3.1 13,14.48 13,6.2 15.62,6.2 IC2.10
OFF  (via drill 0.4)
  Top 0.406: T1.C 102.2,15.3 v102.5,15.6
  Bottom 0.406: v102.5,15.6 101.33,16.77 JP11.1
ON  (via drill 0.4)
  Top 0.406: v95,15.6 96.2,15.6 D2.2
  Bottom 0.406: JP11.2 94.47,15.07 v95,15.6
POWER  (via drill 0.4)
  Top 0.406: R2.2 64.5,23.2 65.5,24.2 86,24.2 v86.6,23.6
  Bottom 0.406: v86.6,23.6 87.43,22.77 JP9.1
ROW0  (via drill 0.4)
  Top 0.406: v45.8,14.8 45.4,15.2 42.5,18.1 37.5,18.1 36.1,16.7 34.1,16.7 32,18.8 28.6,18.8 27.4,17.6 21.8,17.6 20.67,18.73 IC3.13
  Bottom 0.406: JP26.1 75.4,20.6 59.7,20.6 56.6,17.5 52.7,13.6 47,13.6 v45.8,14.8
ROW1  (via drill 0.4)
  Top 0.406: v46.4,16 46.2,16.2 43.5,18.9 35.9,18.9 35.5,18.5 34.5,18.5 32.9,20.1 28.4,20.1 25.4,23.1 22.5,23.1 21.94,22.54 IC3.12
  Bottom 0.406: JP26.2 78.44,22.1 78.24,22.3 73.6,22.3 72.8,21.5 65.6,21.5 65,22.1 59.7,22.1 56.4,18.8 56.4,18.6 54.2,16.4 52.4,14.6 47.8,14.6 v46.4,16
ROW2  (via drill 0.4)
  Top 0.406: v19.4,19 IC3.14
  Bottom 0.406: JP15.2 19.4,16.34 v19.4,19
ROW3  (via drill 0.4)
  Top 0.406: v17.2,19.1 15.59,19.1 IC3.17
  Bottom 0.406: JP15.1 17.2,13.7 v17.2,19.1
ROW4  (via drill 0.4)
  Top 0.406: JP25.2 81.4,8.14 81.4,1.6 80.4,0.6 28.9,0.6 13.7,0.6 v13,1.3 | v12.1,18.4 14.32,18.4 IC3.18
  Bottom 0.406: v13,1.3 13,2.9 12.5,3.4 12.1,3.8 v12.1,18.4
ROW5  (via drill 0.4)
  Top 0.406: v23.2,18.8 IC3.11
  Bottom 0.406: JP25.1 79.8,7.2 80.3,7.2 81.4,6.1 81.4,1.6 80.4,0.6 33,0.6 33,1.2 33,18.8 v23.2,18.8
ROW6  (via drill 0.4)
  Top 0.406: v15.7,17.9 18.13,17.9 IC3.15
  Bottom 0.406: JP14.2 15.7,4.54 v15.7,17.9
ROW7  (via drill 0.4)
  Top 0.406: v13.2,21.7 13.2,23 16.5,23 16.86,23 IC3.16
  Bottom 0.406: JP14.1 15.4,2 14,3.4 13.2,4.2 v13.2,21.7
ROW8  (via drill 0.4)
  Top 0.254: LED1.A 27.6,26.35 | 27.6,26.35 33.25,26.35 | 33.25,26.35 LED3.A 38.2,26.35 | 38.2,26.35 LED5.A 44.2,26.35 | 44.2,26.35 LED7.A 50.2,26.35 | 50.2,26.35 LED9.A 56.2,26.35 | 56.2,26.35 LED11.A 62.2,26.35 | 62.2,26.35 LED13.A 68.2,26.35 | 68.2,26.35 LED15.A 74.2,26.35 | 74.2,26.35 LED17.A 81.25,26.35 LED18.A | LED16.A 75.25,26.35 74.2,26.35 | LED14.A 69.25,26.35 68.2,26.35 | LED12.A 63.25,26.35 62.2,26.35 | LED10.A 57.25,26.35 56.2,26.35 | LED8.A 51.25,26.35 50.2,26.35 | LED6.A 45.25,26.35 44.2,26.35 | LED4.A 39.25,26.35 38.2,26.35 | 33.25,26.35 LED2.A | 27.6,26.35 33.25,26.35 | 27.6,26.35 v27.6,27.4
  Bottom 0.254: C67.1 29.2,27.43 v27.6,27.4
ROW9  (via drill 0.4)
  Top 0.254: LED34.A 78.25,29.35 | 78.25,29.35 LED36.A 78.25,29.35 | LED32.A LED34.A | LED30.A LED32.A | LED28.A LED30.A | LED26.A LED28.A | LED26.A LED24.A 43.2,29.35 | LED22.A 43.2,29.35 | LED22.A LED20.A 30.25,29.35 30.25,29.8 LED19.A | LED21.A 36.25,29.35 LED22.A | LED25.A 48.25,29.35 LED26.A | LED27.A 54.25,29.35 LED28.A | LED29.A 60.25,29.35 LED30.A | LED31.A 66.25,29.35 LED32.A | LED33.A 72.25,29.35 LED34.A | 78.25,29.35 LED35.A | LED23.A 42.25,29.35 43.2,29.35
  Top 0.406: LED19.A 30.25,29.8
  Bottom 0.406: C67.2 30.25,29.97 LED19.A
  other vias: 30.25,30.4
ROW10  (via drill 0.4)
  Top 0.254: LED37.A LED39.A | LED39.A LED41.A | LED40.A 39.25,32.35 LED41.A | LED38.A 33.25,32.35 LED39.A | LED41.A 45.4,32.35 | 45.4,32.35 LED43.A 51.6,32.35 | 51.6,32.35 LED45.A 57.6,32.35 | 57.6,32.35 LED47.A 63.4,32.35 | 63.4,32.35 LED49.A 69.4,32.35 | 69.4,32.35 LED51.A 76.4,32.35 | 76.4,32.35 LED53.A | LED52.A 75.25,32.35 76.4,32.35 | LED50.A 69.25,32.35 69.4,32.35 | LED48.A 63.25,32.35 63.4,32.35 | LED46.A 57.25,32.35 57.6,32.35 | LED44.A 51.25,32.35 51.6,32.35 | LED42.A 45.25,32.35 45.4,32.35 | LED54.A 81.25,32.35 LED53.A | LED53.A 77.2,32.39 v77.6,32.39
  Bottom 0.254: v77.6,32.39 C45.1 77.6,33.53 v77.6,32.39 | v77.6,32.39 77.6,32.23
ROW11  (via drill 0.4)
  Top 0.254: 36.4,35.35 LED56.A 30.25,35.35 LED55.A | 36.4,35.35 LED58.A 43.2,35.35 | 43.2,35.35 LED60.A 48.8,35.35 | 48.8,35.35 LED62.A 54.4,35.35 | 54.4,35.35 LED64.A LED66.A | LED66.A LED68.A | LED68.A 72.4,35.35 | 72.4,35.35 LED70.A 79.2,35.35 | 79.2,35.35 LED72.A 80.2,35.4 v81.4,35.4 | LED57.A 36.25,35.35 36.4,35.35 | LED59.A 42.25,35.35 43.2,35.35 | LED61.A 48.25,35.35 48.8,35.35 | LED63.A 54.25,35.35 54.4,35.35 | LED65.A 60.25,35.35 LED66.A | LED67.A 66.25,35.35 LED68.A | LED69.A 72.25,35.35 72.4,35.35 | LED71.A 78.25,35.35 79.2,35.35
  Bottom 0.254: C45.2 80.2,35.37 v81.4,35.4
ROW12  (via drill 0.4)
  Top 0.254: 39.4,38.35 LED75.A 33.6,38.35 | 39.4,38.35 LED77.A 45.6,38.35 | 45.6,38.35 LED79.A 51.4,38.35 | 51.4,38.35 LED81.A 57.4,38.35 | 57.4,38.35 LED83.A 63.6,38.35 | 63.6,38.35 LED85.A 69.2,38.35 | 69.2,38.35 LED87.A 75.6,38.35 | 75.6,38.35 LED89.A 81.25,38.35 LED90.A | LED73.A 33.6,38.35 | LED88.A 75.25,38.35 75.6,38.35 | LED86.A 69.25,38.35 69.2,38.35 | LED84.A 63.25,38.35 63.6,38.35 | LED82.A 57.25,38.35 57.4,38.35 | LED80.A 51.25,38.35 51.4,38.35 | LED78.A 45.25,38.35 45.6,38.35 | LED76.A 39.25,38.35 39.4,38.35 | 33.6,38.35 33.25,38.35 LED74.A v32.6,39.4
  Bottom 0.254: C23.1 32.43,39.23 v32.6,39.4
ROW13  (via drill 0.4)
  Top 0.254: 32.8,41.35 LED92.A | 32.8,41.35 36.4,41.35 | 36.4,41.35 LED94.A 42.8,41.35 | 42.8,41.35 LED96.A 48.6,41.35 | 48.6,41.35 LED98.A 54.4,41.35 | 54.4,41.35 LED100.A 60.4,41.35 | 60.4,41.35 LED102.A 66.6,41.35 | 66.6,41.35 LED104.A 72.6,41.35 | 72.6,41.35 LED106.A 78.4,41.35 | 78.4,41.35 LED108.A | v30.25,41.8 30.25,41.35 32.8,41.35 | v30.25,41.8 LED91.A v30.25,41.8 | LED93.A 36.25,41.35 36.4,41.35 | LED95.A 42.25,41.35 42.8,41.35 | LED97.A 48.25,41.35 48.6,41.35 | LED99.A 54.25,41.35 54.4,41.35 | LED101.A 60.25,41.35 60.4,41.35 | LED103.A 66.25,41.35 66.6,41.35 | LED105.A 72.25,41.35 72.6,41.35 | LED107.A 78.25,41.35 78.4,41.35
  Bottom 0.254: C23.2 30.22,41.77 v30.25,41.8
ROW14  (via drill 0.4)
  Top 0.254: LED109.A 34.2,44.35 | 34.2,44.35 LED111.A 39.4,44.35 | 39.4,44.35 LED113.A 45.6,44.35 | 45.6,44.35 LED115.A 51.6,44.35 | 51.6,44.35 LED117.A 57.6,44.35 | 57.6,44.35 LED119.A 63.6,44.35 | 63.6,44.35 LED121.A 69.4,44.35 | 69.4,44.35 LED123.A 75.6,44.35 | 75.6,44.35 LED125.A 81.25,44.35 LED126.A 81.6,45.4 v81,45.6 | LED124.A 75.25,44.35 75.6,44.35 | LED122.A 69.25,44.35 69.4,44.35 | LED120.A 63.25,44.35 63.6,44.35 | LED118.A 57.25,44.35 57.6,44.35 | LED116.A 51.25,44.35 51.6,44.35 | LED114.A 45.25,44.35 45.6,44.35 | LED112.A 39.25,44.35 39.4,44.35 | LED110.A 33.25,44.35 34.2,44.35
  Bottom 0.254: v81,45.6 80.07,45.6 C08.1
ROW15  (via drill 0.4)
  Top 0.254: 36.2,47.35 LED128.A 30.25,47.35 LED127.A | 36.2,47.35 LED130.A 42.6,47.35 | 42.6,47.35 LED132.A LED134.A | LED134.A 55,47.35 | 55,47.35 LED136.A 60.6,47.35 | 60.6,47.35 LED138.A 66.6,47.35 | 66.6,47.35 LED140.A 72.2,47.35 | 72.2,47.35 LED142.A 78.4,47.35 | 78.4,47.35 LED144.A | LED129.A 36.25,47.35 36.2,47.35 | LED131.A 42.25,47.35 42.6,47.35 | LED133.A 48.25,47.35 LED134.A | LED135.A 54.25,47.35 55,47.35 | LED137.A 60.25,47.35 60.6,47.35 | LED139.A 66.25,47.35 66.6,47.35 | LED141.A 72.25,47.35 72.2,47.35 | 78.4,47.35 78.25,47.35 LED143.A 77.4,48.4 v77.4,49.6
  Bottom 0.254: v77.4,49.6 77.4,48.17 C08.2
RST  (via drill 0.4)
  Top 0.406: IC1.4 54.7,15 59,15 v59,15.5 | v69.8,15.6 70.6,15.6 R1.2
  Bottom 0.406: v69.8,15.6 65,15.6 64.4,15 60.3,15 59.8,15.5 v59,15.5
RX  (via drill 0.4)
  Top 0.406: IC1.9 52.5,11 53.2,11.7 v55,11.7 | v75.6,19.6 76.3,18.9 79.1,18.9 80.6,17.4 87,17.4 95.4,9 95.4,5.3 v95.4,4.1
  Bottom 0.406: v55,11.7 55,14.6 58.5,18.1 60,19.6 v75.6,19.6 | v95.4,4.1 95.4,3.46 94.47,2.53 JP8.2
TX  (via drill 0.4)
  Top 0.406: IC1.10 53.2,10.2 53.5,10.5 v55.8,10.5 | v57.7,1.7 74.5,1.7 75.5,2.8 75.5,3.9 73.9,5.5 73.7,5.5 v73.2,6 | v86.2,13.7 87.5,13.7 91.5,9.7 91.5,3.3 v91.4,3.1
  Bottom 0.406: v55.8,10.5 55.8,9.3 55,8.5 52.6,8.5 52.1,9 51.7,9.4 49.6,9.4 49.2,9 49.2,8.5 48.1,7.4 48.1,7 49.5,5.7 50.5,5.7 50.9,5.7 51.4,6.2 55,6.2 55.6,5.6 56.16,5.6 56.5,5.6 57.6,4.5 57.7,4.4 57.7,2.6 v57.7,1.7 | v73.2,6 73.2,9.4 76.5,12.7 82.3,12.7 84.2,14.6 85.3,14.6 v86.2,13.7 | v91.4,3.1 91.57,4.77 JP8.1
X  (via drill 0.4)
  Top 0.406: v67.7,23.3 R9.2
  Bottom 0.406: JP1.2 9.7,16.4 9.7,17 9.7,19.3 10.7,20.3 10.7,22.8 12,24.1 26.1,24.1 35.5,24.1 35.8,24.1 63,24.1 66.9,24.1 v67.7,23.3
Y  (via drill 0.4)
  Top 0.406: v69.6,23.2 R8.2
  Bottom 0.406: JP2.2 11.1,6.8 11.1,18 11.1,19 11.6,19.5 11.7,19.5 12.1,19.9 12.1,22.4 12.5,22.8 12.8,23.1 26.1,23.1 35.7,23.1 36.3,23.1 61.7,23.1 62.3,23.1 65.8,23.1 66.6,22.3 68.7,22.3 v69.6,23.2

## Text on the board
tPlace: I/O Module v1 | PentaJoy | seb@exse.net | PentaJoy CPU Module | v1